# Altium PCB PCB_tp1.PcbDoc
Units mm, origin at the board's own origin, x right, y up, seen from the top; angles counter-clockwise.
Board outline 200 x 200 mm, 2 copper layers (Top Layer, Bottom Layer); 83 components, 44 nets, 233 pads, 3 vias.
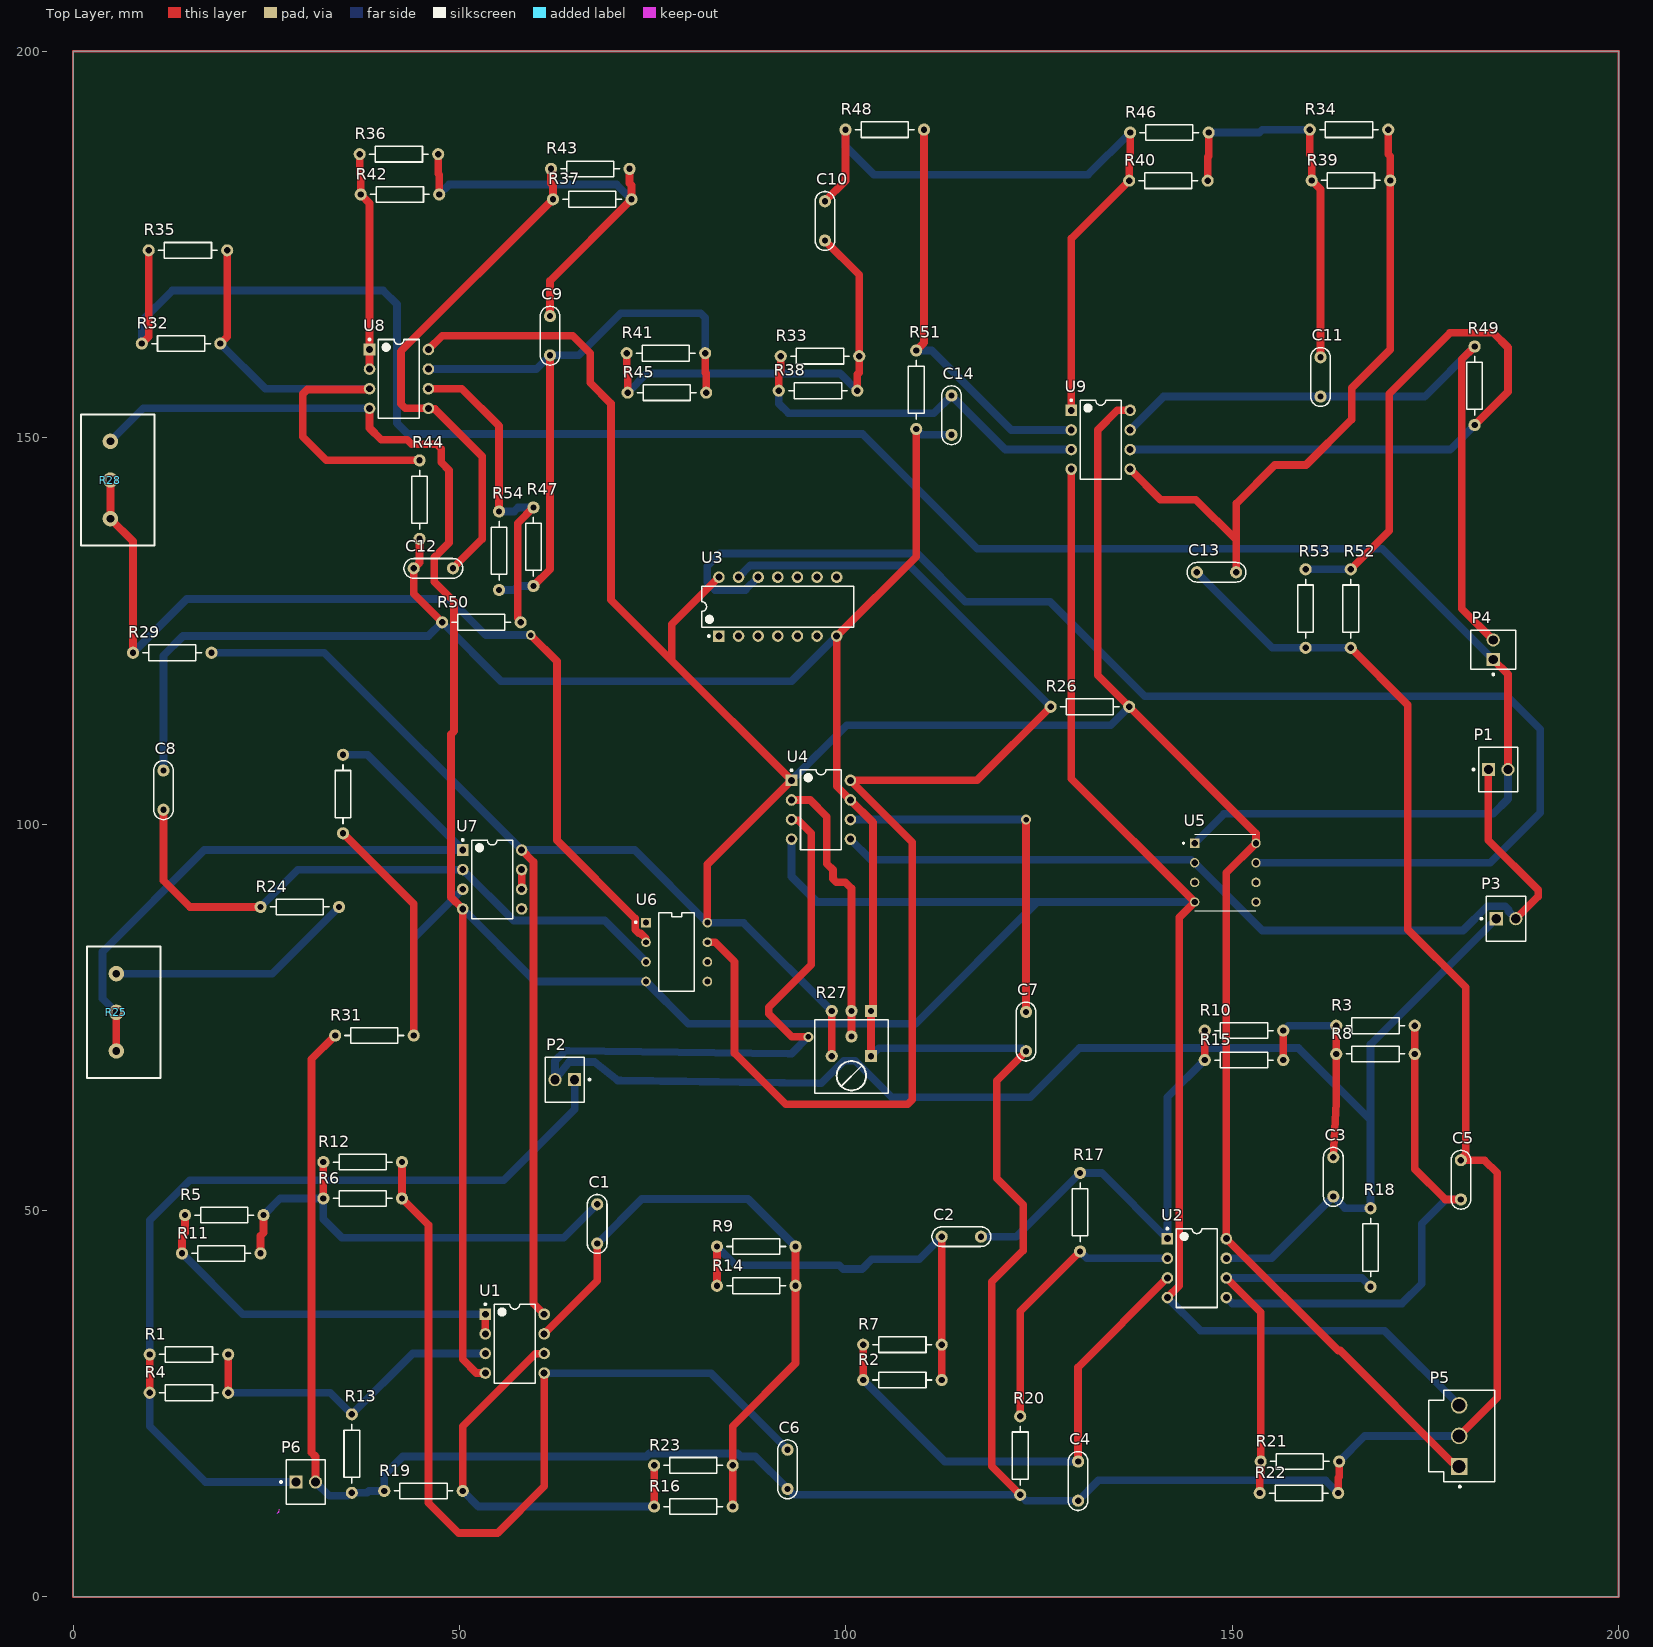
[diagram p0: Top Layer view]
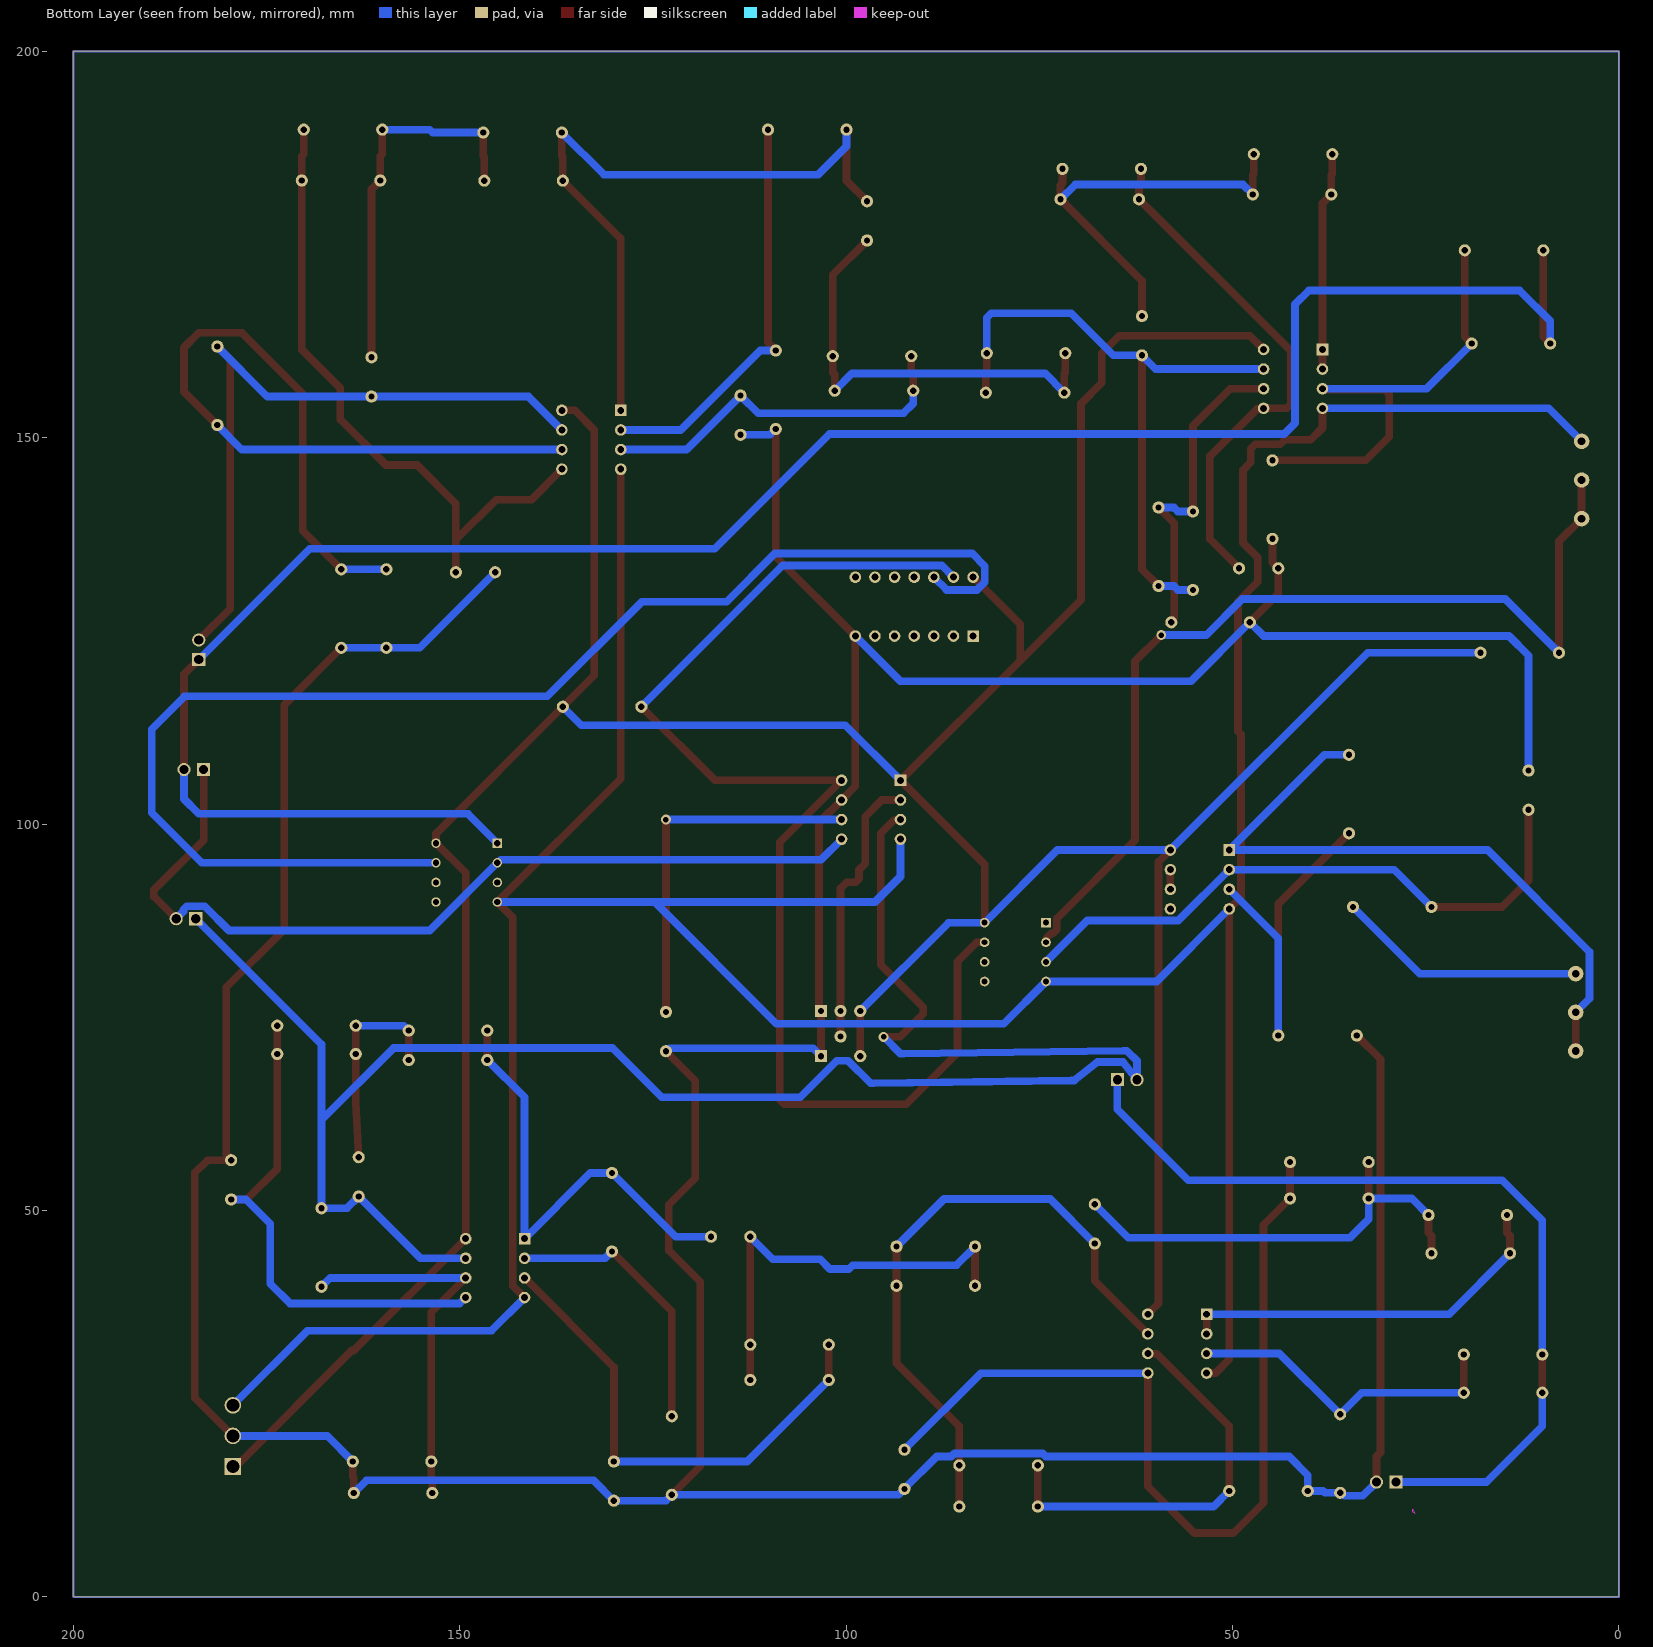
[diagram p1: Bottom Layer view, seen from below]
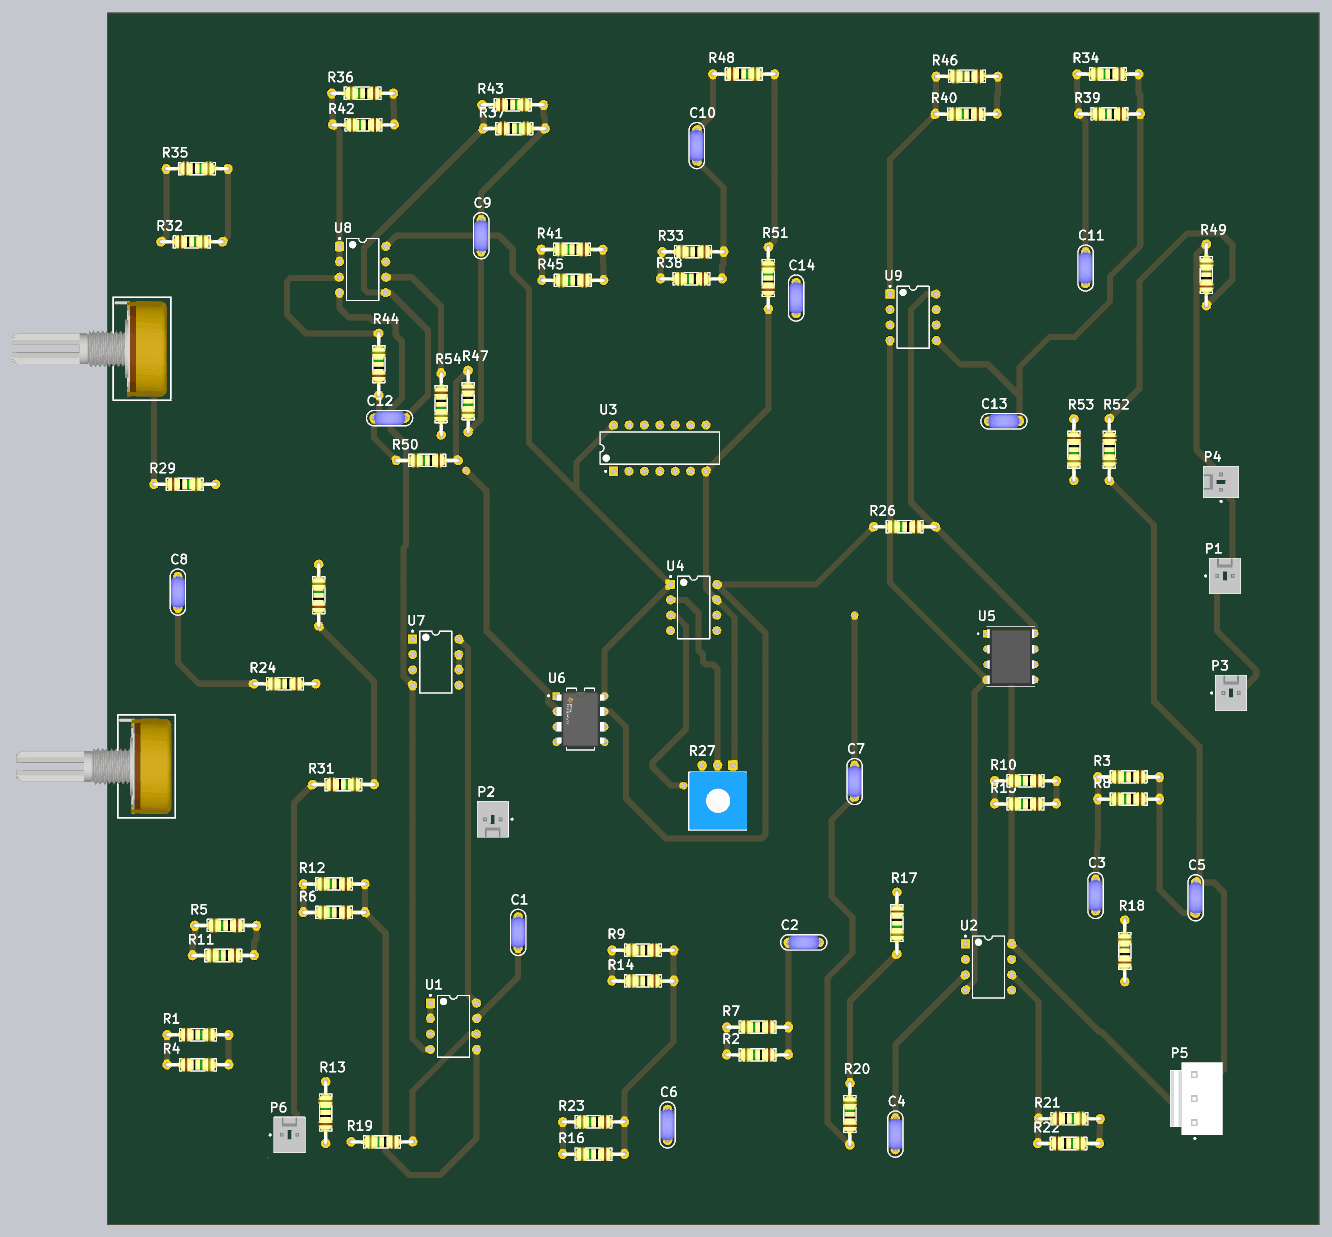
[diagram p2: 3D render of the assembled board from above, using the file's embedded part models]

## Layer stack, top to bottom
Top Solder: solder mask 0.0102, Solder Resist, Dk 3.5
Top Layer: signal copper 0.0356
Dielectric 1: dielectric 0.32, FR-4, Dk 4.8
Bottom Layer: signal copper 0.0356
Bottom Solder: solder mask 0.0102, Solder Resist, Dk 3.5

## Board outline
0,0 200,0 200,200 0,200
cut-out: 26.416,10.795 26.67,11.049 26.67,11.367

## Design rules (kind name [scope] priority, off if disabled: settings)
Clearance [All] p1: gap=0.254 ignorepadtopadclearanceinfootprint=FALSE
PolygonConnect [All] p1: connectstyle=Relief reliefconductorwidth=0.254 reliefentries=4 polygonreliefangle="90 Angle" airgapwidth=0.254
RoutingVias [All] p1: holewidth=0.711 width=1.27 viastyle="Through Hole" minholewidth=0.711 minwidth=1.27 maxholewidth=0.711 maxwidth=1.27
SolderMaskExpansion [All] p1: expansion=0.102 istentingtop=FALSE
SupplyNets "Schematic Supply Nets_2" [InNet('GND')] p1: voltage=0.000
SupplyNets "Schematic Supply Nets_1" [InNet('+5')] p2: voltage=0.000
SupplyNets "Schematic Supply Nets" [InNet('-5')] p3: voltage=0.000
Width [All] p1: maxlimit=1.2 minlimit=0.8 preferedwidth=1 minimp=50.000000 maximp=50.000000 favimp=50.000000
30 further rules are at their usual default settings.

## Components (designator, comment, footprint, x,y, rotation, side; value= is the part's Value field where it differs from the comment)
C1 "10n" CAP200 67.818,48.26 r270 top
C2 "10n" CAP200 114.935,46.609 r180 top
C3 "10n" CAP200 163.068,54.356 r270 top
C4 "10n" CAP200 130.048,14.986 r90 top
C5 "10n" CAP200 179.578,53.975 r90 top
C6 "10n" CAP200 92.456,16.51 r270 top
C7 "10n" CAP200 123.317,73.152 r270 top
C8 "10n" CAP200 11.684,104.394 r90 top
C9 "10n" CAP200 61.722,163.195 r270 top
C10 "10n" CAP200 97.282,178.054 r270 top
C11 "10n" CAP200 161.417,157.861 r270 top
C12 "10n" CAP200 46.609,133.096 r180 top
C13 "10n" CAP200 147.955,132.588 r180 top
C14 "10n" CAP200 113.665,152.908 r90 top
P1 "22-27-2021" MOLX-22-27-2021_V 184.404,107.061 r0 top
P2 "22-27-2021" MOLX-22-27-2021_V 63.627,66.929 r180 top
P3 "22-27-2021" MOLX-22-27-2021_V 185.42,87.757 r0 top
P4 "22-27-2021" MOLX-22-27-2021_V 183.769,122.555 r90 top
P5 "B3P-VH(LF)(SN)" JST-B3P-VH(LF)(SN)-3_V 180.594,20.828 r90 top
P6 "22-27-2021" MOLX-22-27-2021_V 30.099,14.859 r0 top
R1 "8k2" RES400 9.906,31.369 r0 top
R2 "1200" RES400 112.395,28.067 r180 top
R3 "10k" RES400 173.609,73.914 r180 top
R4 "15k" RES400 9.906,26.416 r0 top
R5 "680" RES400 24.638,49.403 r180 top
R6 "680" RES400 42.545,51.562 r180 top
R7 "1200" RES400 112.395,32.639 r180 top
R8 "820" RES400 173.609,70.256 r180 top
R9 "1200" RES400 93.472,45.339 r180 top
R10 "10k" RES400 156.591,73.279 r180 top
R11 "1800" RES400 24.257,44.45 r180 top
R12 "1800" RES400 42.545,56.261 r180 top
R13 "1k" RES400 36.068,13.462 r90 top
R14 "1200" RES400 93.472,40.259 r180 top
R15 "820" RES400 156.591,69.469 r180 top
R16 "18k" RES400 85.344,11.684 r180 top
R17 "10k" RES400 130.302,54.864 r270 top
R18 "10k" RES400 167.894,40.132 r90 top
R19 "10k" RES400 50.419,13.716 r180 top
R20 "10k" RES400 122.555,13.208 r90 top
R21 "3.3Meg" RES400 153.67,17.526 r0 top
R22 "56k" RES400 153.543,13.437 r0 top
R23 "330k" RES400 85.344,17.018 r180 top
R24 "220" RES400 34.417,89.281 r180 top
R25 "2k" POTENCIOMETRO 5.588,75.645 r270 top
R26 "4k7" RES400 136.652,115.189 r180 top
R27 "1k" "PRESET H" 100.751,69.977 r180 top
R28 "1k" POTENCIOMETRO 4.826,144.526 r270 top
R29 "1k" RES400 7.747,122.174 r0 top
R30 "10k" RES400 34.925,98.806 r90 top
R31 "10k" RES400 33.909,72.644 r0 top
R32 "8k2" RES400 8.89,162.179 r0 top
R33 "1200" RES400 101.727,160.553 r180 top
R34 "10k" RES400 170.18,189.865 r180 top
R35 "15k" RES400 9.779,174.244 r0 top
R36 "680" RES400 47.244,186.69 r180 top
R37 "680" RES400 62.103,180.848 r0 top
R38 "1200" RES400 101.473,156.083 r180 top
R39 "820" RES400 170.434,183.286 r180 top
R40 "10k" RES400 146.812,183.261 r180 top
R41 "1200" RES400 81.788,160.934 r180 top
R42 "1800" RES400 47.371,181.483 r180 top
R43 "1800" RES400 61.849,184.785 r0 top
R44 "1k" RES400 44.831,136.906 r90 top
R45 "1200" RES400 81.915,155.829 r180 top
R46 "820" RES400 146.939,189.484 r180 top
R47 "18k" RES400 59.563,140.97 r270 top
R48 "10k" RES400 99.949,189.865 r0 top
R49 "10k" RES400 181.356,151.638 r90 top
R50 "10k" RES400 57.912,126.111 r180 top
R51 "10k" RES400 109.093,151.13 r90 top
R52 "3.3Meg" RES400 165.329,132.969 r270 top
R53 "56k" RES400 159.487,132.969 r270 top
R54 "330k" RES400 55.118,140.462 r270 top
U1 "TL082CP" P0008A 57.15,32.766 r0 top
U2 "TL082CP" P0008A 145.415,42.545 r0 top
U3 "SN74HC04N" N0014A 91.186,128.143 r90 top
U4 "LF398N" N08E 96.774,101.854 r0 top
U5 "MAX320CPA+" DIP794W47P254L991H457Q8 149.098,93.726 r0 top
U6 "LM311P" FP-P0008A-MFG 78.105,83.439 r0 top
U7 "TL082CP" P0008A 54.229,92.837 r0 top
U8 "TL082CP" P0008A 42.164,157.607 r0 top
U9 "TL082CP" P0008A 132.969,149.733 r0 top

## Footprints (in the part's own frame and the unit in brackets; to place one, negate y for a bottom-side part, rotate by r counter-clockwise, add the part's x,y. Pads: shape width x height; smd on the part's side, far side on the other; paste and mask are expansions set on the pad)
CAP200 [mil]
  round 62 hole 32: 1(-100,0) 2(100,0)
  silkscreen extent -150,-50 150,50, body extent -110,-46 110,44, height 246
DIP794W47P254L991H457Q8 [mm]
  rect 1.22x1.22 / inner round 1.22 / far side rect 1.22x1.22 hole 0.81: 1(-3.97,3.81)
  round 1.22 hole 0.81: 2(-3.97,1.27) 3(-3.97,-1.27) 4(-3.97,-3.81) 5(3.97,-3.81) 6(3.97,-1.27) 7(3.97,1.27) 8(3.97,3.81)
  silkscreen extent -5.51,-4.96 3.94,4.96, body extent -3.91,-4.69 3.91,4.69, height 4.57
FP-P0008A-MFG [mm]
  rect 1.25x1.25 hole 0.75 paste-2539.97 mask+0: 1(-3.97,3.81)
  round 1.25 hole 0.75 paste-2539.97 mask+0: 2(-3.97,1.27) 3(-3.97,-1.27) 4(-3.97,-3.81) 5(3.97,-3.81) 6(3.97,-1.27) 7(3.97,1.27) 8(3.97,3.81)
  silkscreen extent -5.42,-5.08 2.3,5.08, body extent -4.69,-5.18 4.69,5.18, height 0.25
JST-B3P-VH(LF)(SN)-3_V [mm] "Connector, 3-Leads, Body 8.5x11.82mm, Pitch 3.96mm"
  rect 2.15x2.15 hole 1.65: 1(-3.96,1.25)
  round 2.15 hole 1.65: 2(0,1.25) 3(3.96,1.25)
  silkscreen extent -6.68,-3.35 5.91,5.15, body extent -5.91,-3.35 5.91,5.15, height 10.9
MOLX-22-27-2021_V [mm] "Header, 2-Leads, Body 5.8x5.08mm"
  rect 1.7x1.7 hole 1.19: 1(-1.27,0)
  round 1.7 hole 1.19: 2(1.27,0)
  silkscreen extent -3.31,-2.9 2.54,2.9, body extent -2.54,-2.9 2.54,2.9, height 11.72
N08E [mm] "DIP, 8-Pin, Row Spacing 7.62 mm, Pitch 2.54 mm"
  rect 1.5x1.5 hole 0.9: 1(-3.81,3.81)
  round 1.5 hole 0.9: 2(-3.81,1.27) 3(-3.81,-1.27) 4(-3.81,-3.81) 5(3.81,-3.81) 6(3.81,-1.27) 7(3.81,1.27) 8(3.81,3.81)
  silkscreen extent -3.93,-5.15 2.65,5.23, body extent -3.6,-5.15 3.6,5.15, height 5.33
N0014A [mm] "DIP, 14-Leads, Body 19.7x6.6mm, Pitch 2.54mm"
  rect 1.5x1.5 hole 0.9: 1(-3.81,7.62)
  round 1.5 hole 0.9: 2(-3.81,5.08) 3(-3.81,2.54) 4(-3.81,0) 5(-3.81,-2.54) 6(-3.81,-5.08) 7(-3.81,-7.62) 8(3.81,-7.62) 9(3.81,-5.08) 10(3.81,-2.54) 11(3.81,0) 12(3.81,2.54) 13(3.81,5.08) 14(3.81,7.62)
  silkscreen extent -3.93,-9.85 2.65,9.85, body extent -3.95,-9.85 3.95,9.85, height 5.08
P0008A [mm] "DIP, 8-Leads, Body 10.15x6.6mm, Pitch 2.54mm"
  rect 1.5x1.5 hole 0.9: 1(-3.81,3.81)
  round 1.5 hole 0.9: 2(-3.81,1.27) 3(-3.81,-1.27) 4(-3.81,-3.81) 5(3.81,-3.81) 6(3.81,-1.27) 7(3.81,1.27) 8(3.81,3.81)
  silkscreen extent -3.93,-5.1 2.65,5.23, body extent -3.95,-5.07 3.95,5.07, height 5.08
POTENCIOMETRO [mm]
  round 2 hole 1: 1(-5,0) 2(0,0) 3(5,0)
  silkscreen extent -8.5,-3.8 8.5,5.7, body extent -7.87,-20.53 7.87,5.03, height 20.12
"PRESET H" [mil]
  rect 62x62 hole 32: 1(-98.43,0) 1(-98.43,-230)
  round 62 hole 32: 2(1.57,-100) 2(1.57,-230) 3(101.57,0) 3(101.57,-230)
  silkscreen extent -186,-185 189,190, body extent -190,-188 185,188, height 197
RES400 [mil]
  round 62 hole 32: 1(0,0) 2(400,0)
  silkscreen extent 50,-40 350,40, body extent -12,-45 412,46, height 96

## Part data
C1 C2 C3 C4 C5 C6 C7 C8 C9 C10 C11 C12 C13 C14: library part CAP
P1 P2 P3 P4 P6: library part CMP-2000-05537-1, "Male Header, Pitch 2.54 mm, 1 x 2 Position, Height 11.7 mm, Tail Length 3.56 mm, 0 to 75 degC, RoHS, Bulk", Current - Max=4A, Manufacturer=Molex, Operating temperature=0°Cto+75°C, Package Description="2-Leads Header, Body 5.08 x 5.8 mm, Pitch 2.54 mm", Package Version="Rev. BC, 02/2012", PartNumber=0022272021, Voltage - Max=250V, Contact material=Tinplatedbrass, Current rating=4A, Datasheet URL=http://www.molex.com/pdm_docs/sd/022272021_sd.pdf, Datasheet Version="Rev. F, 06/2009", Housing material=Nylon(UL94V-0), Manufacturer URL=http://www.molex.com/, Mounting Technology=ThroughHole, No. of Positions=2, No. of Rows=1, Orientation=Vertical, Package Reference=22-27-2021, Pitch=2.54mm, Voltage rating=250V
P5: library part CMP-1755-00003-1, "Male Header, Pitch 3.96 mm, 1 x 3 Position, Height 10.9 mm, Tail Length 3.7 mm, -25 to 85 degC, RoHS, Bulk", ComponentLink1Description="Manufacturer URL", ComponentLink1URL=http://www.jst.com/home2.html, ComponentLink2Description=Datasheet, ComponentLink2URL=http://www.jst-mfg.com/product/pdf/eng/eVH.pdf, DatasheetVersion=May-16, PackageDescription="Male Header, Pitch 3.96 mm, 1 x 3 Position, Height 10.9 mm, Tail Length 3.7 mm", PackageReference=B3P-VH(LF)(SN)
R1 R2 R3 R4 R5 R6 R7 R8 R9 R10 R11 R12 R13 R14 R15 R16 R17 R18 R19 R20 R21 R22 R23 R24 R26 R29 R30 R31 R32 R33 R34 R35 R36 R37 R38 R39 R40 R41 R42 R43 R44 R45 R46 R47 R48 R49 R50 R51 R52 R53 R54: library part RES
R25 R28: library part POTENCIOMETRO
R27: library part PRESET
U1 U2 U7 U8 U9: library part CMP-0055-00158-5, "JFET-Input Operational Amplifier, 7 to 36 V, 0 to 70 degC, 8-pin DIP (P8), Pb-Free (RoHS)", Manufacturer="Texas Instruments", Rating=Catalog, Total Supply Voltage(Max)(+5V is 5, +/-5V is 10)=36, Total Supply Voltage(Min)(+5V is 5, +/-5V is 10)=7, CMRR(Min)(dB)=70, Code_JEDEC=MS-001, ComponentLink1Description="Manufacturer URL", ComponentLink1URL=http://www.ti.com/, ComponentLink2Description=Datasheet, ComponentLink2URL=http://www.ti.com/lit/ds/symlink/tl082.pdf, ComponentLink3Description="Package Specification", ComponentLink3URL=http://www.ti.com/litv/pdf/mpdi001b, DatasheetVersion=SLOS081G, Eco-Plan="Pb-Free (RoHS)", GBW(Typ)(MHz)=3, IIB(Max)(pA)=400, Iq per channel(Max)(mA)=2.8, Mounting Technology="Through Hole", Number of Channels=2, Offset Drift(Typ)(uV/C)=18, PackageDescription="8-Pin Plastic In-Line, Body 9.59 x 6.35 mm, Pitch 2.54 mm", PackageReference=P0008A, PackageVersion="4040082/E, 04/2010", PartNumber=TL082CP, Slew Rate(Typ)(V/us)=13, Sub Family="General Purpose Amplifier, High Supply Voltage Amplifier (>=30V)", Vio (25C)(Max)(mV)=15, Vn at 1kHz(Typ)(nV/rtHz)=18
U3: library part CMP-1615-00892-2, "Hex Inverters, N0014A, TUBE", F @ Nom Voltage(Max)(Mhz)=20, Generic Part Number=SN74HC04, ICC @ Nom Voltage(Max)(mA)=0.02, Manufacturer="Texas Instruments", Operating Temperature Range(C)="-40 to 85", Rating=Catalog, Voltage(Nom)(V)=5, Bits(#)=6, Code_JEDEC=MS-001, DatasheetVersion=SCLS078F, Input Type=CMOS, Output Drive (IOL/IOH)(Max)(mA)=-4/4, Output Type=CMOS, PackageReference=N0014A, Schmitt Trigger=No, Technology Family=HC, tpd @ Nom Voltage(Max)(ns)=20, VCC(Max)(V)=6, VCC(Min)(V)=2
U4: library part CMP-0056-00013-2, "Monolithic Sample and Hold Circuits, 8-pin MDIP", Manufacturer="National Semiconductor", PackageTopMarking=NSUZXYTTE#*LF*398N, PowerWise=N, Code_JEDEC=MS-001-BA, ComponentLink1Description="LF398 Datasheet", ComponentLink1URL=http://www.national.com/ds/LF/LF398.pdf, ComponentLink2Description="LF398 Web Page", ComponentLink2URL=http://www.national.com/pf/LF/LF398.html, ComponentLink3Description="N08E Package Page", ComponentLink3URL=http://www.national.com/packaging/folders/n08e.html, CompType="Analog IC", DatasheetVersion=Jul-2000, PackageDescription="MDIP, .365 x .250 x .130in, 8 Lead, .100in Pitch", PackageReference=N08E, PackageVersion="revG, May-2006", PinCount=8, RevisionNote="Component URLs added", RoHS=N
U5: "Precision, Dual Supply, SPST, Analog CMOS Switches", Package="PDIP-8 Maxim", Check_prices=https://www.snapeda.com/parts/MAX320CPA+/Analog+Devices/view-part/?ref=eda, MF="Analog Devices", MP=MAX320CPA+, SnapEDA_Link=https://www.snapeda.com/parts/MAX320CPA+/Analog+Devices/view-part/?ref=snap
U6: library part CMP-1685-00016-2, Ambient Temperature Range High=70°C, Case Code (Imperial)=0603, Case Code (Metric)=1608, Case/Package=PDIP, Dual Supply Voltage=9V, Input Bias Current=250nA, Input Offset Voltage (Vos)=2mV, Manufacturer Lifecycle Status=ACTIVE, Max Dual Supply Voltage=15V, Max Junction Temperature (Tj)=150°C, Max Output Voltage=7.5mV, Max Power Dissipation=500mW, Max Supply Current=7.5mA, Max Supply Voltage=30V, Min Dual Supply Voltage=1.75V, Min Operating Temperature=0°C, Min Supply Voltage=3.5V, Operating Supply Voltage=28V, Output Current=50mA, Power Rating=100mW, Resistance=390Ω, Tolerance=1%, Voltage Gain=106.02dB, Voltage rating=75V, Contact Plating=Gold, Height=5.08mm, Lead Free="Lead Free", Length=9.81mm, Lifecycle Status=Production, Max Input Current=250nA, Max Operating Temperature=70°C, Mount="Surface Mount, Through Hole", NexarPartId=24336, Nominal Supply Current=7.5mA, Number of Channels=1, Number of Circuits=1, Number of Elements=1, Number of Pins=8, Output Current per Channel=50mA, Output Type=TTL, Packaging="Tape and Reel", Propagation Delay=115ns, Quiescent Current=7.5mA, Radiation Hardening=No, REACH SVHC="No SVHC", Response Time=165ns, RoHS=Compliant, Schedule B="8542390000, 8542390000", Thickness=3.9mm, Turn-On Delay Time=115ns, Type="General Purpose", Weight=2.012816mg, Width=6.35mm

## Via types
v1: diameter 1.27, hole 0.711, Top Layer to Bottom Layer, 3 vias

## Nets (pads, with @x,y where several pads share a name; then routed paths per layer and width w, separated by ;. In a path a pad name is that pad's centre, name@x,y a point inside that pad or via, vN(x,y) a via of type N, cw(c..) or ccw(c..) an arc to the next point about the centre after c; other vN are vias at no path point)
+5: P5.1 R26.1 R27.3 R29.2 U1.8 U2.8 U3.14 U4.1 U5.8 U6.8 U7.8 U8.8 U9.8 | length 501.4
  Top Layer w1: U8.8 47.752,163.195 64.643,163.195 66.929,160.909 66.929,157.099 69.596,154.432 69.596,129.032 77.47,121.158 ; U7.8 59.563,95.123 59.563,37.973 U1.8 ; U6.8 82.075,94.775 U4.1 77.47,121.158 ; U3.14 77.47,125.857 77.47,121.158 ; R27.3@98.171,69.977 R27.3@98.171,75.819 ; U9.8 135.128,153.543 132.588,151.003 132.588,119.253 R26.1 153.068,98.773 U5.8 149.225,93.693 U2.8 163.703,31.877 163.957,31.877 178.391,17.443 178.769,17.443 P5.1
  Bottom Layer w1: R29.2 32.512,122.174 U7.8 72.677,96.647 U6.8 86.741,87.249 R27.3@98.171,75.819 ; U4.1 100.101,112.801 134.264,112.801 R26.1
-5: P5.3 R28.1 U1.4 U2.4 U4.4 U5.4 U6.4 U7.4 U8.4 U9.4 | length 476.9
  Top Layer w1: U8.4 38.354,151.257 39.876,149.735 43.229,149.735 43.815,149.149 47.039,149.149 47.625,148.563 47.625,146.812 48.641,145.796 48.641,136.398 46.736,134.493 46.736,131.343 49.301,128.778 49.301,112.039 48.895,111.633 48.895,90.551 U7.4 50.419,30.734 52.178,28.975 53.321,28.975 U1.4 ; U9.4 129.159,105.885 U5.4 143.129,87.917 143.129,40.259 U2.4
  Bottom Layer w1: R28.1 9.097,153.797 U8.4 ; U7.4 59.817,79.629 U6.4 79.596,74.168 109.017,74.168 124.765,89.916 ; U4.4 92.964,93.218 96.266,89.916 124.765,89.916 ; U2.4 145.898,34.442 169.69,34.442 P5.3 ; U5.4 124.765,89.916
CLK: R26.2 U3.13 U4.8 U6.7 | length 165.4
  Top Layer w1: U6.7 82.086,84.698 83.069,84.698 85.598,82.169 85.598,70.358 92.202,63.754 107.999,63.754 108.585,64.34 108.585,97.663 U4.8 116.967,105.664 R26.2
  Bottom Layer w1: U3.13 87.63,133.477 108.204,133.477 R26.2
GND: C4.1 C5.2 C6.2 C7.2 C8.2 C12.2 C13.2 C14.1 P5.2 P6.2 R13.1 R19.2 R20.1 R21.2 R22.2 R27.1 R31.1 R44.1 R50.2 R51.1 R52.2 R53.2 U3.7 U4.7 | length 657.9
  Top Layer w1: P6.2 31.369,18.161 30.836,18.694 30.836,69.571 R31.1 ; R44.1 44.831,133.858 C12.2 44.069,129.794 R50.2 ; R27.1@103.251,69.977 103.251,75.819 103.505,76.073 103.505,100.203 U4.7 98.806,104.902 U3.7 109.093,134.62 R51.1 ; R20.1 118.872,16.891 118.872,40.767 122.936,44.831 122.936,50.736 119.507,54.165 119.507,66.802 C7.2 ; R22.2 163.703,15.418 163.83,15.545 R21.2 ; R52.2 172.72,115.418 172.72,86.36 180.213,78.867 180.213,57.306 179.578,56.671 C5.2 182.626,56.515 184.277,54.864 184.277,25.761 P5.2
  Bottom Layer w1: C8.2 11.684,121.793 14.224,124.333 45.974,124.333 R50.2 55.372,118.491 92.964,118.491 U3.7 ; P6.2 33.147,13.081 35.531,13.081 35.912,13.462 R13.1 38.024,13.462 38.278,13.716 R19.2 40.259,15.748 42.672,18.161 74.147,18.161 74.546,18.559 85.982,18.559 86.381,18.161 88.265,18.161 C6.2 93.218,13.208 R20.1 123.317,12.446 C4.1 132.69,15.088 162.052,15.088 R22.2 ; R27.1@103.251,69.977 104.267,70.993 122.78,70.993 123.161,70.612 C7.2 ; R51.1 109.855,150.368 C14.1 ; C13.2 155.194,122.809 R53.2 R52.2 ; R21.2 167.132,20.828 P5.2
nCLK: U3.12 U5.7 | length 178
  Bottom Layer w1: U3.12 86.995,130.302 83.058,130.302 82.042,131.318 82.042,133.375 83.693,135.026 109.195,135.026 115.443,128.778 126.416,128.778 138.659,116.535 185.598,116.535 189.865,112.268 189.865,101.473 183.388,94.996 U5.7
NetC1_1: C1.1 R5.1 R6.2 R11.1 R12.2 | length 59.3
  Top Layer w1: R11.1 24.257,46.736 24.638,47.117 R5.1 ; R6.2 R12.2
  Bottom Layer w1: R5.1 26.797,51.562 R6.2 32.385,48.895 34.798,46.482 63.5,46.482 C1.1
NetC1_2: C1.2 R9.1 R14.1 R16.1 R23.1 U1.7 | length 82.1
  Top Layer w1: U1.7 67.818,40.894 C1.2 ; R16.1 R23.1 85.344,22.098 93.472,30.226 R14.1 R9.1
  Bottom Layer w1: C1.2 73.584,51.486 87.325,51.486 R9.1
NetC2_1: C2.1 R10.2 R15.2 R17.1 U2.1 | length 60
  Top Layer w1: R15.2 R10.2
  Bottom Layer w1: C2.1 122.047,46.609 R17.1 133.096,54.864 U2.1 141.605,64.643 R15.2
NetC2_2: C2.2 R2.1 R7.1 R9.2 R14.2 | length 55.7
  Top Layer w1: R14.2 R9.2 ; R2.1 R7.1 C2.2
  Bottom Layer w1: R9.2 85.725,42.926 99.139,42.926 99.647,42.418 102.076,42.418 103.346,43.688 109.474,43.688 C2.2
NetC3_1: C3.1 R3.2 R8.2 R10.1 R15.1 | length 28
  Top Layer w1: R15.1 R10.1 ; C3.1 163.449,63.957 R8.2 R3.2
  Bottom Layer w1: R10.1 157.226,73.914 R3.2
NetC4_2: C4.2 R2.2 R7.2 U2.3 | length 65.3
  Top Layer w1: R2.2 R7.2 ; C4.2 130.048,29.718 U2.3
  Bottom Layer w1: R2.2 112.776,17.526 C4.2
NetC5_1: C5.1 R3.1 R8.1 U2.5 | length 66.9
  Top Layer w1: R3.1 R8.1 173.609,55.372 177.546,51.435 C5.1
  Bottom Layer w1: U2.5 149.987,37.973 171.958,37.973 174.498,40.513 174.498,48.26 177.673,51.435 C5.1
NetC6_1: C6.1 R6.1 R12.1 U1.5 | length 114.9
  Top Layer w1: R12.1 R6.1 45.974,48.133 45.974,12.192 49.911,8.255 54.915,8.255 60.96,14.3 U1.5
  Bottom Layer w1: U1.5 82.55,28.956 C6.1
NetC7_1: C7.1 U4.6 | length 47.6
  Top Layer w1: C7.1 v1(123.317,100.584)
  Bottom Layer w1: U4.6 v1(123.317,100.584)
NetC8_1: C8.1 R24.2 U6.3 U7.2 | length 80
  Top Layer w1: C8.1 11.684,92.71 15.113,89.281 R24.2
  Bottom Layer w1: R24.2 29.083,94.107 U7.2 57.003,87.523 68.781,87.523 U6.3
NetC9_1: C9.1 R36.1 R37.2 R42.1 R43.2 | length 55
  Top Layer w1: R36.1 47.244,184.15 47.371,184.023 R42.1 ; C9.1 61.722,170.307 R37.2 72.263,182.677 72.009,182.931 R43.2
  Bottom Layer w1: R42.1 48.641,182.753 70.358,182.753 R37.2
NetC9_2: C9.2 R41.1 R45.1 R47.2 R54.2 U8.7 | length 84.2
  Top Layer w1: R47.2 61.722,132.969 C9.2 ; R41.1 81.788,158.445 81.915,158.318 R45.1
  Bottom Layer w1: U8.7 59.944,158.877 C9.2 65.405,160.655 70.866,166.116 81.202,166.116 81.788,165.53 R41.1 ; R54.2 57.074,130.302 57.582,130.81 R47.2
NetC10_1: C10.1 R40.2 R46.2 R48.1 U9.1 | length 92.2
  Top Layer w1: C10.1 99.949,183.261 R48.1 ; U9.1 129.159,175.768 R40.2 136.652,186.309 136.779,186.436 R46.2
  Bottom Layer w1: R48.1 99.949,187.706 103.632,184.023 131.318,184.023 R46.2
NetC10_2: C10.2 R33.1 R38.1 R41.2 R45.2 | length 58.2
  Top Layer w1: R41.2 71.628,158.445 71.755,158.318 R45.2 ; C10.2 101.727,171.069 R33.1 101.727,158.445 101.473,158.191 R38.1
  Bottom Layer w1: R45.2 74.244,158.318 99.238,158.318 R38.1
NetC11_1: C11.1 R34.2 R39.2 R40.1 R46.1 | length 49.6
  Top Layer w1: R40.1 146.812,186.309 146.939,186.436 R46.1 ; R34.2 160.02,186.69 160.274,186.436 R39.2 161.417,182.143 C11.1
  Bottom Layer w1: R46.1 153.492,189.484 153.873,189.865 R34.2
NetC12_1: C12.1 R37.1 R43.1 U8.5 | length 67.9
  Top Layer w1: U8.5 43.004,153.797 42.418,154.383 42.418,161.163 R37.1 62.103,182.677 61.849,182.931 R43.1 ; U8.5@46.07,153.701 46.832,153.701 52.959,147.574 52.959,136.906 C12.1
NetC13_1: C13.1 R34.1 R39.1 U9.5 | length 85.5
  Top Layer w1: U9.5 140.716,141.986 145.288,141.986 150.495,136.779 ; C13.1 150.495,136.779 ; R34.1 170.18,186.69 170.434,186.436 R39.1 170.434,161.417 165.449,156.432 165.449,152.368 159.544,146.463 155.48,146.463 150.495,141.478 150.495,136.779
NetC14_2: C14.2 R33.2 R38.2 U9.3 | length 48.4
  Top Layer w1: R38.2 91.313,158.191 91.567,158.445 R33.2
  Bottom Layer w1: R38.2 91.313,154.432 92.583,153.162 111.379,153.162 C14.2 120.65,148.463 U9.3
NetR1_2: R1.2 R4.2 R13.2 U1.3 | length 42.6
  Top Layer w1: R4.2 R1.2
  Bottom Layer w1: R4.2 33.274,26.416 R13.2 43.942,31.496 U1.3
NetR5_2: R5.2 R11.2 U1.1 U1.2 | length 50.2
  Top Layer w1: R11.2 14.097,46.736 14.478,47.117 R5.2 ; U1.2 U1.1
  Bottom Layer w1: R11.2 21.971,36.576 U1.1
NetR16_2: R16.2 R19.1 R23.2 U1.6 | length 53.8
  Top Layer w1: R19.1 50.419,22.098 59.798,31.477 60.941,31.477 U1.6 ; R16.2 R23.2
  Bottom Layer w1: R19.1 52.451,11.684 R16.2
NetR17_2: R17.2 R20.2 U2.2 | length 36.2
  Top Layer w1: R20.2 122.555,36.957 R17.2
  Bottom Layer w1: R17.2 131.191,43.815 U2.2
NetR18_1: R18.1 R21.1 R22.1 U2.6 | length 48.9
  Top Layer w1: U2.6 153.67,36.83 R21.1 153.67,15.545 153.543,15.418 R22.1
  Bottom Layer w1: U2.6 166.751,41.275 R18.1
NetR24_1: R24.1 R25.1 | length 32.4
  Bottom Layer w1: R25.1 25.781,80.645 R24.1
NetR25_2: R25.2 R25.3 R30.2 U7.1 | length 86.2
  Top Layer w1: R25.3 R25.2
  Bottom Layer w1: R25.2 3.81,77.423 3.81,83.49 16.967,96.647 U7.1 38.1,108.966 R30.2
NetR27_2: R27.2 U4.2 | length 35.9
  Top Layer w1: U4.2 95.377,103.124 97.536,100.965 97.536,94.869 98.33,94.075 98.33,92.932 98.774,92.488 99.917,92.488 100.711,91.694 100.711,75.819 R27.2@100.711,72.517
NetR28_2: R28.2 R28.3 R29.1 U6.2 | length 125.9
  Top Layer w1: R28.2 R28.3 7.747,136.605 R29.1 ; v1(59.207,124.46) 62.611,121.056 62.611,97.917 72.756,87.772 72.756,86.312 73.198,85.87 73.424,85.87 74.087,85.207 74.087,84.757 U6.2
  Bottom Layer w1: R29.1 14.707,129.134 48.743,129.134 53.416,124.46 v1(59.207,124.46)
NetR30_1: R30.1 R31.2 U7.3 | length 51.5
  Top Layer w1: R30.1 44.069,89.662 R31.2
  Bottom Layer w1: R31.2 44.069,85.217 U7.3
NetR32_2: R32.2 R35.2 R44.2 U8.3 | length 65
  Top Layer w1: R32.2 19.939,163.068 R35.2 ; U8.3 38.258,156.241 30.304,156.241 29.718,155.656 29.718,150.114 32.766,147.066 R44.2
  Bottom Layer w1: R32.2 24.892,156.337 U8.3
NetR36_2: R36.2 R42.2 U8.1 U8.2 | length 28.3
  Top Layer w1: R36.2 37.084,184.15 37.211,184.023 R42.2 38.354,180.34 U8.1 U8.2
NetR47_1: R47.1 R50.1 R54.1 U8.6 | length 42.7
  Top Layer w1: U8.6 50.292,156.337 55.118,151.511 R54.1 ; R50.1 57.912,126.267 57.531,126.648 57.531,138.938 R47.1
  Bottom Layer w1: R54.1 57.074,140.462 57.582,140.97 R47.1
NetR48_2: R48.2 R51.2 U9.2 | length 53.3
  Top Layer w1: R51.2 110.109,162.306 R48.2
  Bottom Layer w1: R51.2 111.125,161.29 121.412,151.003 U9.2
NetR49_1: R49.1 R52.1 R53.1 U9.6 | length 107.8
  Top Layer w1: R52.1 170.307,137.947 170.307,155.702 178.181,163.576 183.769,163.576 185.674,161.671 185.674,155.956 R49.1
  Bottom Layer w1: U9.6 178.181,148.463 R49.1 ; R53.1 R52.1
NetU7_6: U7.6 U7.7 | length 2.5
  Top Layer w1: U7.6 U7.7
sgn_faa: C3.2 P2.2 P3.1 R18.2 U2.7 U4.3 | length 255.9
  Top Layer w1: U4.3 93.06,100.488 93.822,100.488 95.504,98.806 95.504,81.788 90.013,76.297 90.013,75.468 93.015,72.466 v1(95.148,72.466)
  Bottom Layer w1: v1(95.148,72.466) 92.962,70.28 92.541,70.28 64.089,70.678 63.668,70.678 62.357,69.368 P2.2 62.552,67.124 64.154,69.215 67.464,69.215 70.494,66.815 70.834,66.81 96.404,66.452 96.826,66.452 99.754,69.38 100.176,69.38 100.815,69.371 101.221,69.366 105.944,64.643 123.842,64.643 130.218,71.018 158.572,71.018 167.894,61.697 ; U2.7 155.067,43.815 C3.2 164.592,50.292 R18.2 167.894,61.697 ; P3.1 167.894,71.501 167.894,61.697
sgn_in: P2.1 P6.1 R1.1 R4.1 | length 113.3
  Top Layer w1: R4.1 R1.1
  Bottom Layer w1: R4.1 9.906,22.098 17.145,14.859 P6.1 ; R1.1 9.906,48.717 15.113,53.924 55.702,53.924 64.897,63.119 P2.1
sgn_nat: P1.2 P4.1 R32.1 R35.1 U5.1 | length 282.4
  Top Layer w1: R32.1 9.779,163.068 R35.1 ; P4.1 185.674,119.38 P1.2
  Bottom Layer w1: R32.1 8.89,165.1 12.827,169.037 40.132,169.037 41.91,167.259 41.91,151.892 43.332,150.47 102.159,150.47 116.992,135.636 169.418,135.636 P4.1 ; U5.1 148.938,101.346 183.769,101.346 185.674,103.251 P1.2
sgn_recup: C11.2 P4.2 R49.2 U9.7 | length 89.4
  Top Layer w1: R49.2 179.705,160.147 179.705,127.889 P4.2
  Bottom Layer w1: U9.7 141.097,155.321 C11.2 174.879,155.321 R49.2
sgn_snh: P1.1 P3.2 U4.5 U5.2 | length 116.3
  Top Layer w1: P1.1 183.134,97.917 189.578,91.473 189.578,90.645 P3.2
  Bottom Layer w1: U4.5 103.251,95.377 144.687,95.377 145.068,94.996 U5.2 153.891,86.233 179.86,86.233 182.988,89.361 185.312,89.361 185.754,88.919 185.754,88.693 P3.2
pads on no net: U3.1 U3.2 U3.3 U3.4 U3.5 U3.6 U3.8 U3.9 U3.10 U3.11 U5.3 U5.5 U5.6 U6.1 U6.5 U6.6 U7.5
copper on no net: | length 2400
  Top Layer w0.254: 200,0 0,0 0,200 200,200 ; 200,0 200,200 ; 200,0 200,200 ; 200,0 200,200 ; 0,200.025 200.025,200.025 0,200.025
  Bottom Layer w0.254: 0,0 200,0 200,200 0,200 0,0